# EAGLE board Full System (EAGLE 8.6.3)
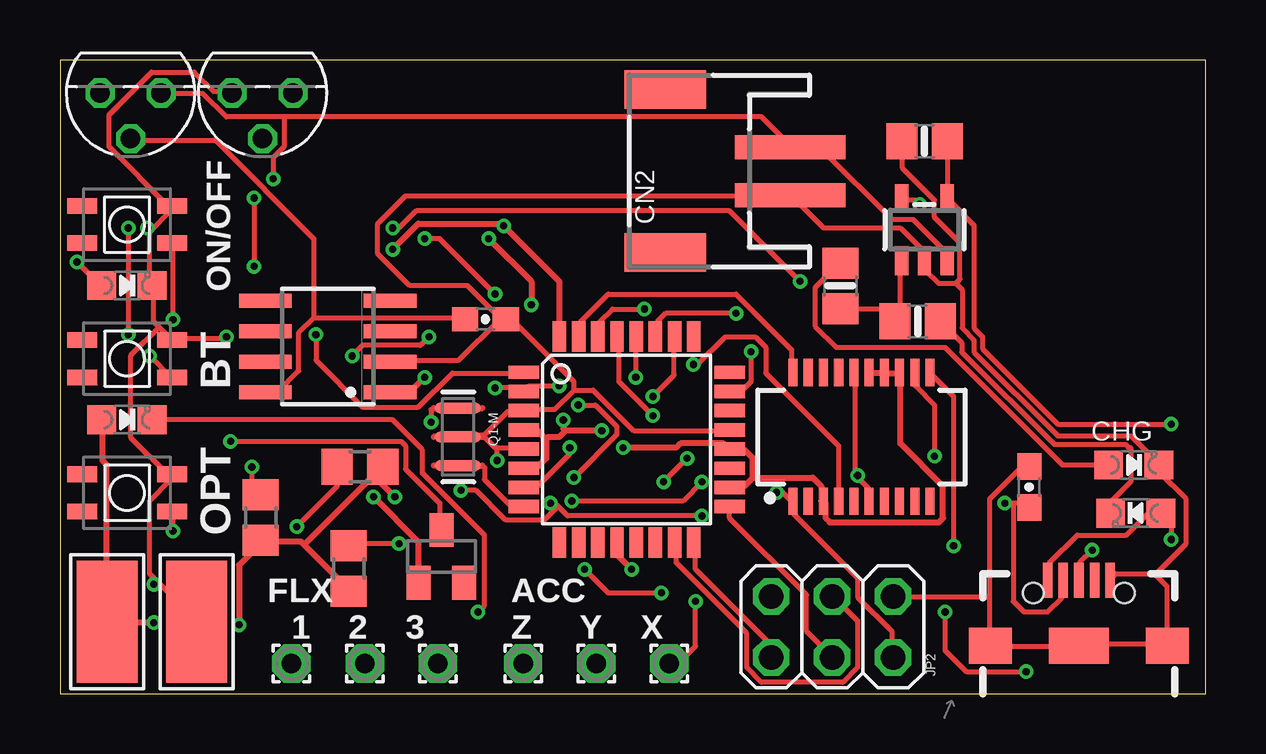
[diagram p0: board, top side]
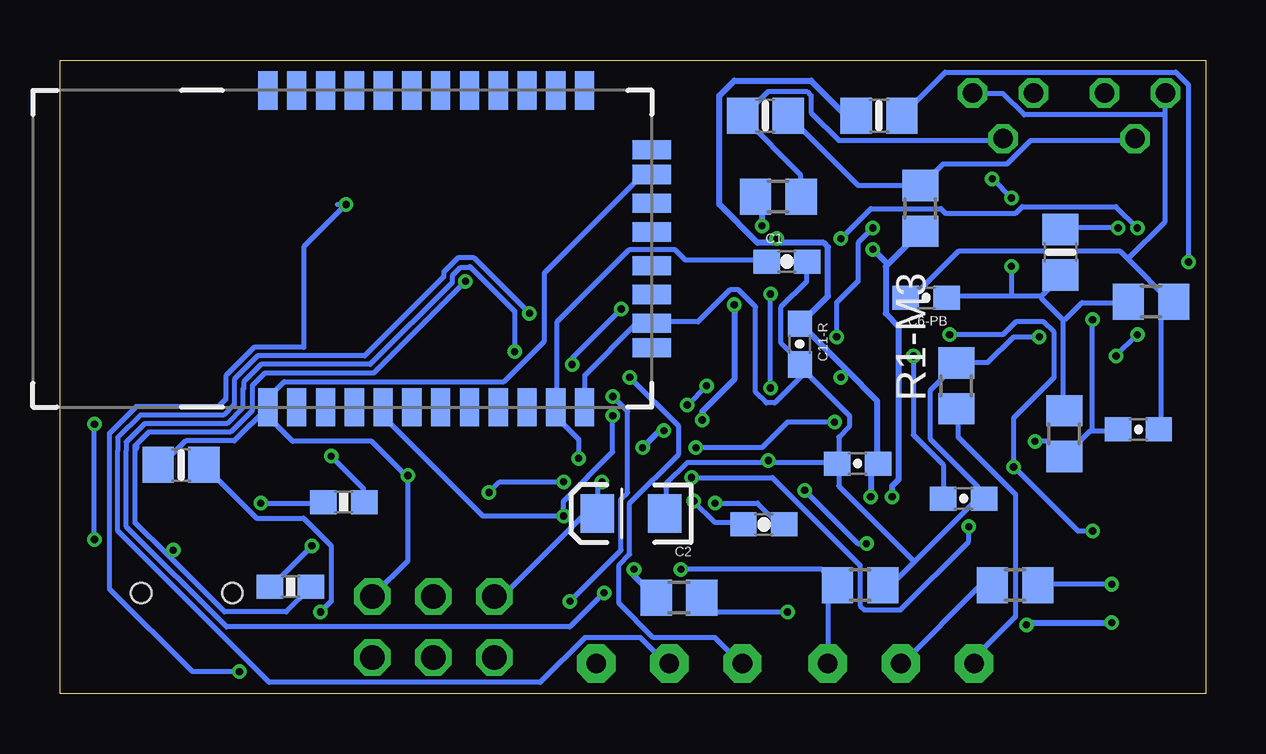
[diagram p1: board, bottom side, seen from below]

Size 47.75 x 26.42 mm. Coordinates in mm from the lower left corner, seen from the top.
Outline: 0,0 47.75,0 47.75,26.42 0,26.42 0,0
Copper layers (1*16): Top 0.035mm / dielectric 1.5mm / Bottom 0.035mm
Design rules "PCBWay_2layer": minimum track width 6mil, minimum drill 0.3mm, track to track 6mil, track to pad 6mil, pad to pad 6mil, via to via 6mil, smd to smd 4mil, copper to edge 10mil, drill to drill 6mil, minimum pad ring 6mil, minimum via ring 6mil, stop-mask expansion 4mil, vias tented up to drill 0.8mm, thermal gap 10mil
Net classes: 0 default: width 0.203 mm; 1 power: width 0.254 mm

## Footprints (pad centres in the part's own frame; a part is rotated, then mirrored left to right if it is on the bottom)
1,6/0,8 = drill 0.813 pad 1.6 octagon: 1 0,0
0603-CAP = smd 1.1 x 1: 1 -0.85,0; 2 0.85,0
EIA3216 = smd 1.4 x 1.6: A 1.4,0; C -1.4,0
0805-NO = smd 1.3 x 1.5: 1 -0.95,0; 2 0.95,0
CHIPLED_0805_NOOUTLINE = smd 1.2 x 1.2: A 0,-1.05; C 0,1.05
JSTPH2 = smd 1 x 4.6: 1 -1,-3.7; 2 1,-3.7 | smd 1.6 x 3.4: NC1 -3.4,1.5; NC2 3.4,1.5
SOT23 = smd 1 x 1.4: 1 -0.95,-1.1; 2 0.95,-1.1; 3 0,1.1
5-2,5 = smd 2.54 x 5.08: 1 0,0
TQFP32-08 = smd 1.27 x 0.559: 1 -4.293,2.8; 2 -4.293,2; 3 -4.293,1.2; 4 -4.293,0.4; 5 -4.293,-0.4; 6 -4.293,-1.2; 7 -4.293,-2; 8 -4.293,-2.8; 17 4.293,-2.8; 18 4.293,-2; 19 4.293,-1.2; 20 4.293,-0.4; 21 4.293,0.4; 22 4.293,1.2; 23 4.293,2; 24 4.293,2.8 | smd 0.559 x 1.27: 9 -2.8,-4.293; 10 -2,-4.293; 11 -1.2,-4.293; 12 -0.4,-4.293; 13 0.4,-4.293; 14 1.2,-4.293; 15 2,-4.293; 16 2.8,-4.293; 25 2.8,4.293; 26 2,4.293; 27 1.2,4.293; 28 0.4,4.293; 29 -0.4,4.293; 30 -1.2,4.293; 31 -2,4.293; 32 -2.8,4.293
SO08 = smd 0.6 x 2.2: 1 -1.905,-2.6; 2 -0.635,-2.6; 3 0.635,-2.6; 4 1.905,-2.6; 5 1.905,2.6; 6 0.635,2.6; 7 -0.635,2.6; 8 -1.905,2.6
2X03 = drill 1.016 octagon: 1 -2.54,-1.27; 2 -2.54,1.27; 3 0,-1.27; 4 0,1.27; 5 2.54,-1.27; 6 2.54,1.27
USB-B-MICRO-SMD_V03 = smd 1.45 x 0.4: D+1 2.725,0; D-1 2.725,0.65; GND1 2.725,-1.3; ID1 2.725,-0.65; VBUS1 2.725,1.3 | smd 1.5 x 1.8: SHIELD1 0,3.685; SHIELD2 0,-3.685 | smd 1.5 x 2.5: SHIELD3 0,0 | hole 0.85: 2.2,1.9; 2.2,-1.9
TO92 = drill 0.813 octagon: 1 1.27,0; 2 0,1.905; 3 -1.27,0
RESONATOR-SMD-1:1 = smd 0.45 x 1.905: 1 -1.2,0; 2 0,0; 3 1.2,0
R0805 = smd 1.3 x 1.5: 1 -0.95,0; 2 0.95,0
0603-RES = smd 1.1 x 1: 1 -0.85,0; 2 0.85,0
TACTILE_SWITCH_SMD = smd 1.25 x 0.65: 1 -1.875,0.775; 2 1.875,0.775; 3 -1.875,-0.775; 4 1.875,-0.775
RN41 = smd 0.8 x 1.6: 1 -6.6,-6.6; 2 -5.4,-6.6; 3 -4.2,-6.6; 4 -3,-6.6; 5 -1.8,-6.6; 6 -0.6,-6.6; 7 0.6,-6.6; 8 1.8,-6.6; 9 3,-6.6; 10 4.2,-6.6; 11 5.4,-6.6; 12 6.6,-6.6; 13 6.6,6.6; 14 5.4,6.6; 15 4.2,6.6; 16 3,6.6; 17 1.8,6.6; 18 0.6,6.6; 19 -0.6,6.6; 20 -1.8,6.6; 21 -3,6.6; 22 -4.2,6.6; 23 -5.4,6.6; 24 -6.6,6.6 | smd 1.6 x 0.8: 28 9.4,3.1; 29 9.4,-3.1; 30 9.4,4.122; 31 9.4,1.9; 32 9.4,0.7; 33 9.4,-0.7; 34 9.4,-1.9; 35 9.4,-4.122
SOT23-5 = smd 0.55 x 1.2: 1 -0.95,-1.3; 2 0,-1.3; 3 0.95,-1.3; 4 0.95,1.3; 5 -0.95,1.3
SSOP20_L = smd 0.381 x 1.143: 1 -2.857,-2.68; 2 -2.223,-2.68; 3 -1.587,-2.68; 4 -0.953,-2.68; 5 -0.318,-2.68; 6 0.318,-2.68; 7 0.953,-2.68; 8 1.587,-2.68; 9 2.223,-2.68; 10 2.857,-2.68; 11 2.857,2.68; 12 2.223,2.68; 13 1.587,2.68; 14 0.953,2.68; 15 0.318,2.68; 16 -0.318,2.68; 17 -0.953,2.68; 18 -1.587,2.68; 19 -2.223,2.68; 20 -2.857,2.68

## Placement (x,y rotation side)
ACC_X  [1,6/0,8]  25.4,1.27 0 top
ACC_Y  [1,6/0,8]  22.35,1.27 0 top
ACC_Z  [1,6/0,8]  19.3,1.27 0 top
C1  0.1uF  [0603-CAP]  17.45,18.02 0 bottom
C2  10uF  [EIA3216]  23.95,7.52 180 bottom
C2-M  0.1uF  [0603-CAP]  18.41,7.06 180 bottom
C4-PB  10µF  [0805-NO]  18.34,24.09 180 bottom
C6-PB  0.1uF  [0603-CAP]  11.64,16.51 180 bottom
C7-PB  1uF  [0603-CAP]  2.8,11.02 0 bottom
C8-C  10µF  [0805-NO]  36.04,23.03 180 top
C9-C  10µF  [0805-NO]  6.04,18.4 90 bottom
C10-R  0.1uF  [0603-CAP]  17.74,15.61 0 top
C11-R  2.2uF  [0603-CAP]  16.92,14.58 270 bottom
C12-U  47pF  [0603-CAP]  10.08,8.14 0 bottom
C13-U  47pF  [0603-CAP]  40.4,8.62 90 top
C14-U  0.1uF  [0603-CAP]  14.5,9.6 180 bottom
CHG  GREEN  [CHIPLED_0805_NOOUTLINE]  44.76,9.54 270 top
CN2  JSTPH  [JSTPH2]  26.74,21.79 90 top
D1-PB  [SOT23]  15.9,5.73 0 top
FLX0-  [1,6/0,8]  15.75,1.27 0 top
FLX1-  [1,6/0,8]  12.7,1.27 0 top
FLX2-  [1,6/0,8]  9.65,1.27 0 top
GND_PAD  5x2.5mm  [5-2,5]  5.7,3.02 180 top
IC1  MEGA328-A  [TQFP32-08]  23.62,10.6 0 top
IC2  L4931D  [SO08]  11.17,14.48 90 top
JP1  [2X03]  32.19,2.8 0 top
JP2  USB-MICROB"  [USB-B-MICRO-SMD_V03]  42.47,2.01 90 top
LED1-R  RED  [CHIPLED_0805_NOOUTLINE]  2.79,17.02 270 top
LED2-M  Blue  [CHIPLED_0805_NOOUTLINE]  2.79,11.43 270 top
LED3-C  RED  [CHIPLED_0805_NOOUTLINE]  44.84,7.54 90 top
N_FET  [TO92]  8.44,25.04 180 top
P_FET  [TO92]  2.94,25.04 180 top
Q1-M  8MHz, 22pF  [RESONATOR-SMD-1:1]  16.59,10.71 270 top
R1-M  10k  [R0805]  12.03,5.23 90 top
R1-M1  10k  [R0805]  14.4,4.53 0 bottom
R1-M2  10k  [R0805]  7.94,4.54 0 bottom
R1-M3  10k  [R0805]  10.39,12.84 90 bottom
R2-M  10k  [R0805]  8.37,7.36 270 top
R2-M1  10k  [R0805]  21.95,4.02 0 bottom
R3-M  10k  [R0805]  12.51,9.47 0 top
R4-PB  100k  [R0805]  11.89,20.23 270 bottom
R5-PB  300k  [R0805]  17.81,20.73 180 bottom
R6-PB  10k  [R0805]  5.89,10.85 270 bottom
R7-PB  100k  [R0805]  2.27,16.35 0 bottom
R8-C  470  [0805-NO]  35.75,15.52 180 top
R9-C  470  [0805-NO]  32.53,17 270 top
R10-C  5K\  [0805-NO]  42.7,9.55 180 bottom
R12-R  330  [0805-NO]  13.61,24.09 0 bottom
R13-U  27  [0603-RES]  35.92,7.99 0 bottom
R14-U  27  [0603-RES]  38.14,4.47 0 bottom
S1  Power  [TACTILE_SWITCH_SMD]  2.79,19.56 0 top
S2  Option  [TACTILE_SWITCH_SMD]  2.79,8.38 180 top
S3  BT_C  [TACTILE_SWITCH_SMD]  2.79,13.97 180 top
U1  BLUETOOTH-RN41"  [RN41]  32.48,18.55 0 bottom
U2  MCP73831T-2ACI/OT  [SOT23-5]  36.03,19.35 0 top
U3  FTS31XS-U  [SSOP20_L]  33.41,10.71 0 top
VCC_PAD  5x2.5mm  [5-2,5]  1.96,3.02 0 top

## Library data of the parts
ACC_X ACC_Y ACC_Z FLX0- FLX1- FLX2- GND_PAD VCC_PAD = wirepad
C1 C2 C2-M = SparkFun
C4-PB C8-C C9-C CHG CN2 LED1-R LED2-M LED3-C R8-C R9-C R10-C R12-R U2 = microbuilder
C6-PB C7-PB C10-R C11-R C14-U = SparkFun-Capacitors; PROD_ID: CAP-00810
C12-U C13-U = SparkFun-Capacitors; PROD_ID: CAP-08913
D1-PB = semicon-smd-ipc
IC1 = atmel; MPN: ATMEGA8-16AU; OC_FARNELL: 9171371; OC_NEWARK: 73M8863
IC2 = v-reg-3
JP1 = pinhead
JP2 = SparkFun-Connectors; PROD_ID: CONN-11752
N_FET P_FET = transistor-fet
Q1-M = Testing
R1-M R1-M1-R1-M3 R2-M R2-M1 R3-M R4-PB R5-PB R6-PB R7-PB = rcl; SPICEPREFIX: R
R13-U R14-U = SparkFun-Resistors; PROD_ID: RES-09334
S1-S3 = Spark
U1 = SparkFun-RF
U3 = SparkFun-DigitalIC; PROD_ID: IC-11524

## Nets
3.3V [power]: C11-R.1 C14-U.1 IC1.4 IC1.6 IC1.18 IC1.20 IC2.1 LED2-M.A R1-M.1 R2-M.2 R3-M.2 R12-R.1 U3.3 U3.13 U3.14 U3.15 VCC_PAD.1
ACC_X: ACC_X.1 IC1.26
ACC_Y: ACC_Y.1 IC1.27
ACC_Z: ACC_Z.1 IC1.28
CBUS0: U3.18
CBUS3: U3.19
CTS: U3.9
DCD: U3.8
DSR: U3.7
DTR: C2-M.2 JP1.5 U3.1
FLX0: FLX0-.1 IC1.23 R1-M1.1
FLX1: FLX1-.1 R1-M2.1
FLX2: IC1.25
FLX!: IC1.24
GND: C1.2 C2.C C8-C.2 C9-C.2 C10-R.2 C11-R.2 C12-U.2 C13-U.2 C14-U.2 CHG.C CN2.1 GND_PAD.1 IC1.3 IC1.5 IC1.21 IC2.2 JP1.6 JP2.GND1 JP2.SHIELD1 JP2.SHIELD2 JP2.SHIELD3 LED1-R.C N_FET.1 Q1-M.2 R1-M1.2 R1-M2.2 R1-M3.2 R10-C.2 S1.2 S2.3 S3.3 U1.1 U1.12 U1.28 U1.29 U2.2 U3.6 U3.16
LED1 [power]: IC1.12 R2-M1.1
MISO: IC1.16 JP1.1
MOSI: IC1.15 JP1.4
N$1: R13-U.2 U3.12
N$2: IC1.1 R2-M.1 S2.1
N$3: IC1.7 Q1-M.1
N$4: IC1.8 Q1-M.3
N$5: C7-PB.1 D1-PB.3 R6-PB.2 S1.4
N$6: IC1.2 R3-M.1 S3.1
N$7: LED1-R.A R12-R.2
N$9: C4-PB.2 N_FET.2 R5-PB.1
N$10: LED2-M.C R2-M1.2
N$11: R14-U.1 U3.11
N$12: C12-U.1 JP2.D+1 R14-U.2
N$14: FLX2-.1 R1-M3.1
N$15: C6-PB.2 C7-PB.2 N_FET.3 P_FET.1 R7-PB.2
N$16: LED3-C.C R8-C.1
N$17: R8-C.2 R9-C.2 U2.1
N$18: R10-C.1 U2.5
N$19: CHG.A R9-C.1
N$21: C13-U.1 JP2.D-1 R13-U.1
N$22: U3.17
N$23: U3.10
PIO2: U1.19
PIO3: U1.20
PIO4: U1.22
PIO5: U1.21
PIO6: U1.3
PIO7: U1.4
PIO10: U1.33
PIO11: U1.34
POWER_OFF [power]: D1-PB.1 IC1.32 R4-PB.2 R5-PB.2
RESET: C2-M.1 IC1.29 R1-M.2 U1.5
RI: U3.5
RTS: U3.2
RXI: IC1.30 U3.4
SCK: IC1.17 JP1.3
SPICLK: U1.6
SPICSB: U1.23
SPIMISO: U1.24
SPIMOSI: U1.2
TXO: IC1.31 U3.20
UARTCTS: U1.16
UARTRTS: U1.15
UARTRX: U1.13
UARTTX: U1.14
V_IN: C4-PB.1 C10-R.1 IC2.8 P_FET.2 R4-PB.1
VBAT: C6-PB.1 C9-C.1 CN2.2 P_FET.3 R6-PB.1 R7-PB.1 U2.3
VBUS: C8-C.1 JP2.VBUS1 LED3-C.A U2.4
VCC: C1.1 C2.A JP1.2 U1.11

## Tracks (layer width: path | path; a pad name or v marks a point on that pad's centre or on a via)
3.3V  (via drill 0.3)
  Top 0.254: 20.27,10.62 20.27,9.82 19.91,9.46 19.38,9.46 IC1.6 | 20.27,10.62 19.91,10.97 19.38,10.97 IC1.4 | U3.15 33.78,13.37 34.32,13.37 U3.14 34.4,13.37 34.94,13.37 U3.13 35.03,13.28 35.03,10.44 36.8,8.66 36.8,7.33 36.63,7.15 32.09,7.15 31.91,7.33 31.91,7.95 U3.3 31.74,8.04 31.74,8.66 31.38,9.02 28.89,9.02 | 28.89,9.02 28.54,8.66 27.91,8.66 IC1.18 | 28.89,9.02 28.89,9.82 28.54,10.17 27.91,10.17 IC1.20 27.83,10.26 27.65,10.44 25.87,10.44 25.69,10.26 v23.47,10.26 | 21.07,10.97 20.8,10.71 20.36,10.71 20.27,10.62 | v22.58,10.97 21.07,10.97 | LED2-M.A 1.78,11.42 1.78,9.73 1.96,9.55 1.96,3.06 VCC_PAD.1 2.04,2.97 v3.91,2.97 | 10.18,6.22 12.09,4.3 R1-M.1 | 10.18,6.22 10.05,6.35 8.45,6.35 R2-M.2 8.36,6.26 7.47,5.37 v7.47,2.88 | 10.18,6.22 13.42,9.46 R3-M.2 13.16,9.02 v13.96,8.22 | IC2.1 14.58,12.57 v15.2,13.2 | v20.98,11.42 20.98,11.06 21.07,10.97 | v19.65,16.22 19.65,17.2 v17.87,18.97
  Bottom 0.254: v22.58,10.97 22.76,10.97 v23.47,10.26 | 14.93,13.46 16.89,15.42 C11-R.1 16.8,15.51 15.73,16.57 15.73,18.62 15.91,18.8 17.87,18.8 | 14.93,13.46 13.69,12.22 13.69,9.64 C14-U.1 13.78,9.55 13.96,9.37 v13.96,8.22 | 17.87,18.8 18.67,18.8 20.27,20.4 20.27,24.93 19.65,25.55 16.45,25.55 15.02,24.13 14.58,24.13 R12-R.1 | 14.93,13.46 v15.2,13.2 | v3.91,2.97 7.38,2.97 v7.47,2.88 | v20.98,11.42 20.98,11.77 19.65,13.11 v19.65,16.22 | v17.87,18.97 17.87,18.8
ACC_X  (via drill 0.3)
  Top 0.203: v24.71,12.39 25.6,13.28 25.6,14.88 IC1.26 | v26.49,3.86 26.49,1.99 25.78,1.28 25.43,1.28 ACC_X.1
  Bottom 0.203: v24.71,12.39 24.09,11.77 24.09,8.39 24.36,8.13 24.36,5.99 v26.49,3.86
ACC_Y  (via drill 0.3)
  Top 0.203: v28.18,15.86 25.25,15.86 24.89,15.51 24.89,14.97 IC1.27
  Bottom 0.203: v28.18,15.86 30.49,18.17 31.16,18.17 31.76,17.57 31.76,17.38 35.05,14.08 39.51,14.08 40.49,13.11 40.49,12.06 40.94,11.62 44.4,11.62 45.34,10.68 | 45.34,10.68 45.34,10.71 | ACC_Y.1 22.4,1.19 23.56,2.35 25.87,2.35 27.74,0.48 39.03,0.48 45.34,6.79 45.34,10.16 45.34,10.68
ACC_Z  (via drill 0.3)
  Top 0.203: v24,13.2 24,14.88 IC1.28
  Bottom 0.203: v24,13.2 21.96,11.15 21.96,9.99 24,7.95 24,5.82 24.45,5.37 24.45,3.77 23.02,2.35 20.45,2.35 19.38,1.28 ACC_Z.1
DTR  (via drill 0.3)
  Top 0.203: v21.34,8.04 25.96,8.04 v26.76,8.84 | v29.87,8.39 30.14,8.39 30.49,8.04 U3.1 30.58,7.95 30.58,7.51 33.25,4.84 33.25,4.04 34.67,2.62 34.67,1.55 JP1.5
  Bottom 0.203: v21.34,8.04 20.45,7.15 19.29,7.15 C2-M.2 | v26.76,8.84 29.43,8.84 v29.87,8.39
FLX0  (via drill 0.3)
  Top 0.203: v28.8,14.26 28.8,13.02 28.45,12.66 27.91,12.66 IC1.23 | v25.07,4.22 22.85,4.22 v21.87,5.19
  Bottom 0.203: v28.8,14.26 28.8,15.95 30.56,17.7 | 30.67,17.82 30.56,17.7 | 44.98,10.5 44.98,10.53 | v25.07,4.22 26.49,2.79 40.8,2.79 44.98,6.97 44.98,10.16 44.98,10.5 | v21.87,5.19 16,5.19 15.38,4.57 R1-M1.1 15.38,4.48 15.73,4.13 15.73,1.28 FLX0-.1 | 30.56,17.7 30.57,17.7 30.62,17.75 31.08,17.75 31.4,17.43 31.4,17.14 34.82,13.73 39.37,13.73 40.09,13 40.09,12.74 40.13,12.7 40.13,11.92 40.79,11.26 44.22,11.26 44.98,10.5
FLX1
  Bottom 0.203: R1-M2.1 8.89,4.48 9.42,4.48 12.62,1.28 FLX1-.1
GND  (via drill 0.3)
  Top 0.203: 37.34,17.11 37.52,17.28 37.52,18.8 36.45,19.86 36.45,20.57 35.12,21.91 35.12,22.97 C8-C.2 | 37.34,17.11 36.63,17.11 36.09,17.64 36.09,18 U2.2 36,18.09 36,18.44 35.03,19.42 31.83,19.42 30.49,20.75 CN2.1 30.4,20.75 14.4,20.75 13.25,19.6 13.25,18.35 14.58,17.02 16.98,17.02 18.31,15.68 C10-R.2 | 45.7,5.02 46.94,6.26 46.94,8.13 45.87,9.2 45.87,9.46 CHG.C 45.78,9.64 45.75,9.64 44.64,10.75 41.59,10.75 38.1,14.24 38.1,14.75 37.61,15.24 37.61,16.84 37.34,17.11 | 45.7,5.02 44.01,5.02 43.74,4.75 JP2.GND1 | 45.7,5.02 45.7,4.93 46.14,4.48 46.14,2.08 JP2.SHIELD2 46.05,2.08 42.49,2.08 JP2.SHIELD3 42.41,1.99 38.85,1.99 JP2.SHIELD1 38.76,2.08 38.76,4.04 | 33.16,9.11 33.16,13.37 U3.16 | 33.16,9.11 33.69,8.57 33.69,8.04 U3.6 | 38.76,4.04 38.76,8.13 40.09,9.46 40.36,9.46 C13-U.2 | 38.76,4.04 34.76,4.04 JP1.6 | v33.25,9.11 33.16,9.11 | 4.04,4.71 5.69,3.06 GND_PAD.1 | 4.04,4.71 3.73,5.02 3.73,8.04 4.62,8.93 4.62,9.11 S2.3 4.53,9.11 2.93,10.71 2.93,14.08 4.13,15.28 | 4.04,4.71 v3.91,4.57 | 4.13,15.28 4.62,14.8 S3.3 4.71,14.8 6.84,14.8 v6.93,14.88 | 4.13,15.28 3.91,15.51 3.91,17.02 LED1-R.C 3.82,17.11 3.73,17.2 3.73,19.24 3.78,19.28 | 3.78,19.28 4.62,20.13 4.62,20.31 S1.2 4.53,20.31 2.04,22.8 2.04,24.13 3.82,25.91 5.6,25.91 6.4,25.11 7.11,25.11 N_FET.1 | 3.78,19.28 v3.64,19.42 | C10-R.2 18.31,15.6 16.62,13.91 13.78,13.91 IC2.2 | 18.22,10.26 18.14,10.26 17.69,10.71 Q1-M.2 17.69,10.79 18.67,11.77 19.29,11.77 IC1.3 19.38,11.86 20.62,11.86 21.43,12.66 | 18.22,10.26 19.29,10.26 IC1.5 | 21.43,12.66 22.22,12.66 23.91,10.97 27.83,10.97 IC1.21 | 21.43,12.66 21.43,13.02 18.85,15.6 18.67,15.6 C10-R.2
  Top 0.203: v18.22,9.73 18.22,10.26
  Bottom 0.203: U1.28 23.11,21.64 23.47,21.64 27.56,17.55 27.56,14.71 29.25,13.02 38.41,13.02 39.12,12.31 39.12,12.04 U1.1 | JP1.6 34.67,4.13 33.25,5.55 v33.25,9.11 33.34,9.11 34.76,10.53 38.05,10.53 39.12,11.6 39.12,11.77 U1.1 | v3.91,4.57 6.93,4.57 R1-M2.2 | v3.64,19.42 5.96,19.42 C9-C.2 | 12.14,5.5 13.07,4.57 13.42,4.57 R1-M1.2 | 12.14,5.5 9.51,8.13 9.25,8.13 C12-U.2 9.51,8.22 9.51,8.66 11.47,10.62 11.47,12.66 10.4,13.73 R1-M3.2 10.31,13.82 9.07,13.82 8,14.88 v6.93,14.88 | U1.12 25.87,11.95 25.87,13.28 23.74,15.42 23.11,15.42 U1.29 23.02,15.51 21.16,15.51 19.82,16.84 19.47,16.84 18.76,16.13 18.76,12.57 18.31,12.13 17.96,12.13 16.71,13.37 C11-R.2 | C14-U.2 15.29,9.64 15.29,10.71 14.85,11.15 14.85,11.6 16.89,13.64 C11-R.2 | C1.2 16.62,18 16.62,17.2 17.69,16.13 17.69,14.62 16.89,13.82 C11-R.2 | 18.22,9.64 15.38,9.64 C14-U.2 | 18.22,9.64 21.6,9.64 22.49,8.75 22.49,7.59 C2.C | 12.14,5.5 15.29,8.66 15.29,9.55 C14-U.2 | v18.22,9.73 18.22,9.64 | U1.1 40.48,10.55 42.51,10.55 43.51,9.55 R10-C.2
LED1  (via drill 0.3)
  Top 0.254: v23.82,5.19 23.29,5.73 23.29,6.26 IC1.12
  Bottom 0.254: v23.82,5.19 23.82,4.93 22.94,4.04 R2-M1.1
MISO
  Top 0.203: IC1.16 26.49,6.26 26.49,5.19 29.6,2.08 29.6,1.55 JP1.1
MOSI
  Top 0.203: IC1.15 25.69,6.26 25.69,5.46 28.63,2.53 28.63,1.1 29.25,0.48 32.63,0.48 33.25,1.1 33.25,3.06 32.27,4.04 JP1.4
N$1  (via drill 0.3)
  Top 0.203: v36.45,9.91 36.45,12.04 35.65,12.84 35.65,13.37 U3.12
  Bottom 0.203: v36.45,9.91 35.12,8.57 35.12,8.04 R13-U.2
N$2  (via drill 0.3)
  Top 0.203: v4.71,6.79 4.71,7.59 S2.1 | v8,9.46 8,8.75 8.36,8.39 R2-M.1 | v10.67,14.97 10.67,13.91 12.62,11.95 14.93,11.95 16.36,13.37 19.29,13.37 IC1.1
  Bottom 0.203: v4.71,6.79 5.33,6.79 v8,9.46 8,11.51 6.31,13.2 6.31,15.06 6.76,15.51 7.91,15.51 8.45,14.97 v10.67,14.97
N$3  (via drill 0.3)
  Top 0.203: v21.25,10.26 21.25,9.99 19.91,8.66 19.38,8.66 IC1.7 | v15.47,11.33 15.47,11.86 15.57,11.91
  Bottom 0.203: v21.25,10.26 18.49,10.26 17.42,11.33 v15.47,11.33
N$4
  Top 0.203: IC1.8 19.29,7.86 18.76,7.86 17.69,8.93 17.69,9.46 Q1-M.3
N$5  (via drill 0.3)
  Top 0.203: v4.71,15.6 4.71,18.71 S1.4 | v7.11,10.53 14.22,10.53 14.4,10.35 14.4,9.37 15.82,7.95 15.82,6.88 D1-PB.3
  Bottom 0.203: 4.71,10.97 4.8,10.97 5.87,9.91 R6-PB.2 5.96,9.91 6.58,10.53 v7.11,10.53 | 4.71,10.97 3.73,10.97 C7-PB.1 | 4.71,10.97 v4.71,15.6
N$6  (via drill 0.3)
  Top 0.203: v3.73,14.08 4.62,13.2 S3.1 | v2.84,19.42 v2.84,14.97 | v15.2,18.97 15.82,18.97 v18.14,16.66 | v18.14,12.75 19.2,12.75 19.29,12.66 IC1.2 19.38,12.66 19.56,12.84 v20.8,12.84 | v9.87,6.97 11.56,8.66 R3-M.1 | v21.43,9.02 23.2,10.79 23.2,11.15 22.31,12.04 v21.6,12.04
  Bottom 0.203: v2.84,14.97 v3.73,14.08 | v2.84,19.42 3.73,20.31 7.65,20.31 7.91,20.04 10.85,20.04 11.02,20.22 13.96,20.22 v15.2,18.97 | v18.14,12.75 v18.14,16.66 | v9.87,6.97 9.87,6.35 12.71,3.5 14.22,3.5 14.4,3.68 14.4,5.37 18.05,9.02 v21.43,9.02 | v20.8,12.84 v21.6,12.04
N$7  (via drill 0.3)
  Top 0.203: v0.71,18 1.69,17.02 LED1-R.A
  Bottom 0.203: v0.71,18 0.71,25.38 1.25,25.91 10.85,25.91 12.62,24.13 R12-R.2
N$9
  Bottom 0.203: R5-PB.1 16.89,20.75 16.89,21.64 19.29,24.04 C4-PB.2 19.2,24.13 18.22,25.11 16.62,25.11 16.45,24.93 16.45,24.22 15.29,23.06 8.45,23.06 N_FET.2
N$10  (via drill 0.3)
  Top 0.203: v17.42,3.42 17.69,3.68 17.69,6.62 15.11,9.2 15.11,10.17 13.87,11.42 3.91,11.42 LED2-M.C
  Bottom 0.203: v17.42,3.42 20.45,3.42 20.98,3.95 R2-M1.2
N$11  (via drill 0.3)
  Top 0.203: v37.25,6.17 37.25,12.39 36.27,13.37 U3.11
  Bottom 0.203: v37.25,6.17 38.94,4.48 R14-U.1
N$12  (via drill 0.3)
  Top 0.203: v12.18,14.08 12.62,14.53 15.02,14.53 v15.38,14.88 | v13.87,19.42 14.13,19.42 14.85,20.13 27.91,20.13 v30.85,17.2 | v43.03,5.99 42.49,5.46 42.49,4.75 JP2.D+1
  Bottom 0.203: v12.18,14.08 12.18,10.79 10.93,9.55 10.93,8.22 C12-U.1 | v15.38,14.88 15.38,16.31 14.49,17.2 14.49,18.8 v13.87,19.42 | 44.63,10.35 44.63,10.16 | 44.63,10.16 44.63,7.15 43.25,5.77 | 43.25,5.77 40.89,3.42 38.32,3.42 37.34,4.39 R14-U.2 | 43.25,5.77 v43.03,5.99 | v30.85,17.2 34.67,13.37 39.22,13.37 39.74,12.85 39.74,11.81 40.64,10.91 44.05,10.91 44.56,10.4 44.56,10.23 44.63,10.16
N$14
  Bottom 0.203: R1-M3.1 10.31,11.86 10.31,10.71 7.91,8.31 7.91,3.24 9.6,1.55 9.6,1.28 FLX2-.1
N$15
  Bottom 0.203: C7-PB.2 1.87,11.06 1.87,15.77 1.33,16.31 R7-PB.2 1.42,16.31 3.25,18.13 | 3.25,18.13 3.56,18.44 10.31,18.44 12.18,16.57 12.45,16.57 C6-PB.2 | 1.69,24.13 1.69,19.69 3.25,18.13 | 1.69,24.13 1.69,25.02 P_FET.1 | 1.69,24.13 7.56,24.13 8.45,25.02 9.69,25.02 N_FET.3
N$16
  Top 0.203: 44.63,10.26 44.63,10.16 | 44.63,10.16 44.63,8.84 43.83,8.04 43.83,7.59 LED3-C.C | 36.72,15.51 R8-C.1 37.59,14.63 37.59,14.24 41.44,10.4 44.41,10.4 44.56,10.25 44.56,10.23 44.63,10.16
N$17
  Top 0.203: U2.1 35.03,18 35.03,15.77 34.85,15.6 R8-C.2 34.94,16.04 32.54,16.04 R9-C.2
N$18  (via drill 0.3)
  Top 0.203: v35.83,20.4 35.65,20.57 35.12,20.57 U2.5 | v40.27,0.93 37.78,0.93 36.89,1.82 v36.89,3.42
  Bottom 0.203: 36.18,20.4 v35.83,20.4 37.59,18.63 37.59,14.44 39.66,14.44 40.84,13.26 40.84,12.28 41.15,11.97 44.58,11.97 45.7,10.85 | 45.7,10.88 45.7,10.85 | v40.27,0.93 42.23,0.93 45.7,4.39 45.7,10.67 45.7,10.85 | v36.89,3.42 36.45,3.86 36.45,6.17 37.61,7.33 39.56,7.33 41.69,9.46 R10-C.1
N$19
  Top 0.203: CHG.A 43.65,9.55 41.78,9.55 36.89,14.44 32.36,14.44 31.47,15.33 31.47,16.93 32.45,17.91 R9-C.1
N$21  (via drill 0.3)
  Top 0.203: 39.74,7.95 40.27,7.95 40.36,7.86 C13-U.1 | 39.74,7.95 v39.38,7.95 | 39.74,7.95 39.74,3.86 40.18,3.42 41.16,3.42 41.78,4.04 41.78,4.66 JP2.D-1
  Bottom 0.203: v39.38,7.95 36.8,7.95 R13-U.1
POWER_OFF  (via drill 0.3)
  Top 0.254: IC1.32 20.8,14.97 20.8,17.2 v18.49,19.51 18.4,19.6 14.93,19.6 v13.87,18.53 | v13.07,8.22 14.93,6.35 14.93,4.66 D1-PB.1
  Bottom 0.254: v18.49,19.51 18.49,20.4 18.76,20.66 R5-PB.2 | v13.07,8.22 13.07,8.66 12.8,8.93 12.8,15.33 13.33,15.86 13.33,17.82 13.25,17.91 | 13.25,17.91 11.91,19.24 R4-PB.2 | 13.25,17.91 v13.87,18.53
RESET  (via drill 0.3)
  Top 0.203: v20.45,7.95 20.62,7.95 20.76,7.82 | 20.76,7.82 21.16,7.42 v26.76,7.42 | v24.71,11.6 23.29,13.02 23.29,14.88 IC1.29 | v14.13,6.26 12.09,6.26 R1-M.2 | v16.71,8.48 17.34,8.48 18.58,7.24 20.18,7.24 20.76,7.82
  Bottom 0.203: v20.45,7.95 18.67,7.95 17.87,7.15 17.6,7.15 C2-M.1 | U1.5 34.23,11.86 34.23,11.51 30.14,7.42 v26.76,7.42 26.76,8.04 24.71,10.08 v24.71,11.6 | v14.13,6.26 14.49,6.26 v16.71,8.48
RXI  (via drill 0.3)
  Top 0.203: v26.4,13.73 26.58,13.73 27.74,14.88 28.98,14.88 29.43,14.44 29.43,13.37 32.45,10.35 32.45,8.04 U3.4 | v24.36,16.04 23.02,16.04 22.49,15.51 22.49,14.97 IC1.30
  Bottom 0.203: v26.4,13.73 26.4,13.99 v24.36,16.04
SCK
  Top 0.203: IC1.17 27.91,7.77 27.91,7.33 31.11,4.13 31.11,2.62 32.18,1.55 JP1.3
TXO
  Top 0.203: U3.20 30.49,13.46 30.49,14.35 28.18,16.66 22.85,16.66 21.69,15.51 21.69,14.97 IC1.31
V_IN
  Top 0.203: 10.58,15.68 16.8,15.68 C10-R.1 | 10.58,15.68 9.96,15.06 9.96,13.46 9.07,12.57 IC2.8 | 10.58,15.68 10.58,18.97 6.49,23.06 3.02,23.06 P_FET.2
  Bottom 0.203: C4-PB.1 17.34,24.04 14.49,21.2 11.91,21.2 R4-PB.1 11.82,21.2 10.93,22.09 8.27,22.09 7.29,23.06 3.02,23.06 P_FET.2
VBAT  (via drill 0.3)
  Top 0.203: U2.3 36.89,18.09 36.89,18.44 35.56,19.77 34.67,19.77 31.74,22.71 30.49,22.71 CN2.2 30.4,22.88 29.25,24.04 9.33,24.04 | 9.33,24.04 6.93,24.04 5.96,25.02 4.27,25.02 P_FET.3 | v8.09,20.66 v8.09,17.82 | v8.89,21.46 8.89,22.35 9.33,22.8 9.33,24.04
  Bottom 0.203: 6.84,16.57 8.09,16.57 | 8.09,16.57 10.76,16.57 C6-PB.1 | 6.84,16.57 6.05,17.37 C9-C.1 | 5.96,15.6 5.96,11.86 R6-PB.1 | 5.96,15.6 6.84,16.48 6.84,16.57 | R7-PB.1 3.29,16.31 5.16,16.31 5.87,15.6 5.96,15.6 | v8.09,17.82 8.09,16.57 | v8.89,21.46 v8.09,20.66
VBUS  (via drill 0.3)
  Top 0.203: U2.4 36.98,20.66 36.98,22.97 C8-C.1 | JP2.VBUS1 41.25,4.75 41.25,5.46 42.41,6.62 44.45,6.62 45.34,7.51 45.87,7.51 LED3-C.A 45.87,7.42 46.32,6.97 v46.32,6.44 | 36.98,20.57 U2.4 | U2.4 38.1,19.53 38.1,15.25 38.46,14.89 38.46,14.39 41.6,11.24 v46.32,11.24
  Bottom 0.203: v46.32,6.44 v46.32,11.24
VCC  (via drill 0.3)
  Top 0.203: v26.14,9.82 v25.16,8.84
  Bottom 0.203: JP1.2 29.6,4.13 29.25,4.13 25.87,7.51 25.43,7.51 C2.A 25.34,7.59 25.34,8.66 v25.16,8.84 | C1.1 18.31,18.09 21.69,18.09 22.14,18.53 24,18.53 27.03,15.51 27.03,11.95 U1.11 27.03,11.86 27.03,11.51 26.14,10.62 v26.14,9.82

## Text on the board
tPlace: ON/OFF | BT | OPT | FLX | ACC | 1 2 3 | Z Y X